# Altium PCB BUCK-BOOST.PcbDoc
Units mm, origin at the board's own origin, x right, y up, seen from the top; angles counter-clockwise.
Board outline 55.14 x 50.45 mm, 2 copper layers (Top Layer, Bottom Layer); 21 components, 8 nets, 42 pads, 27 vias.
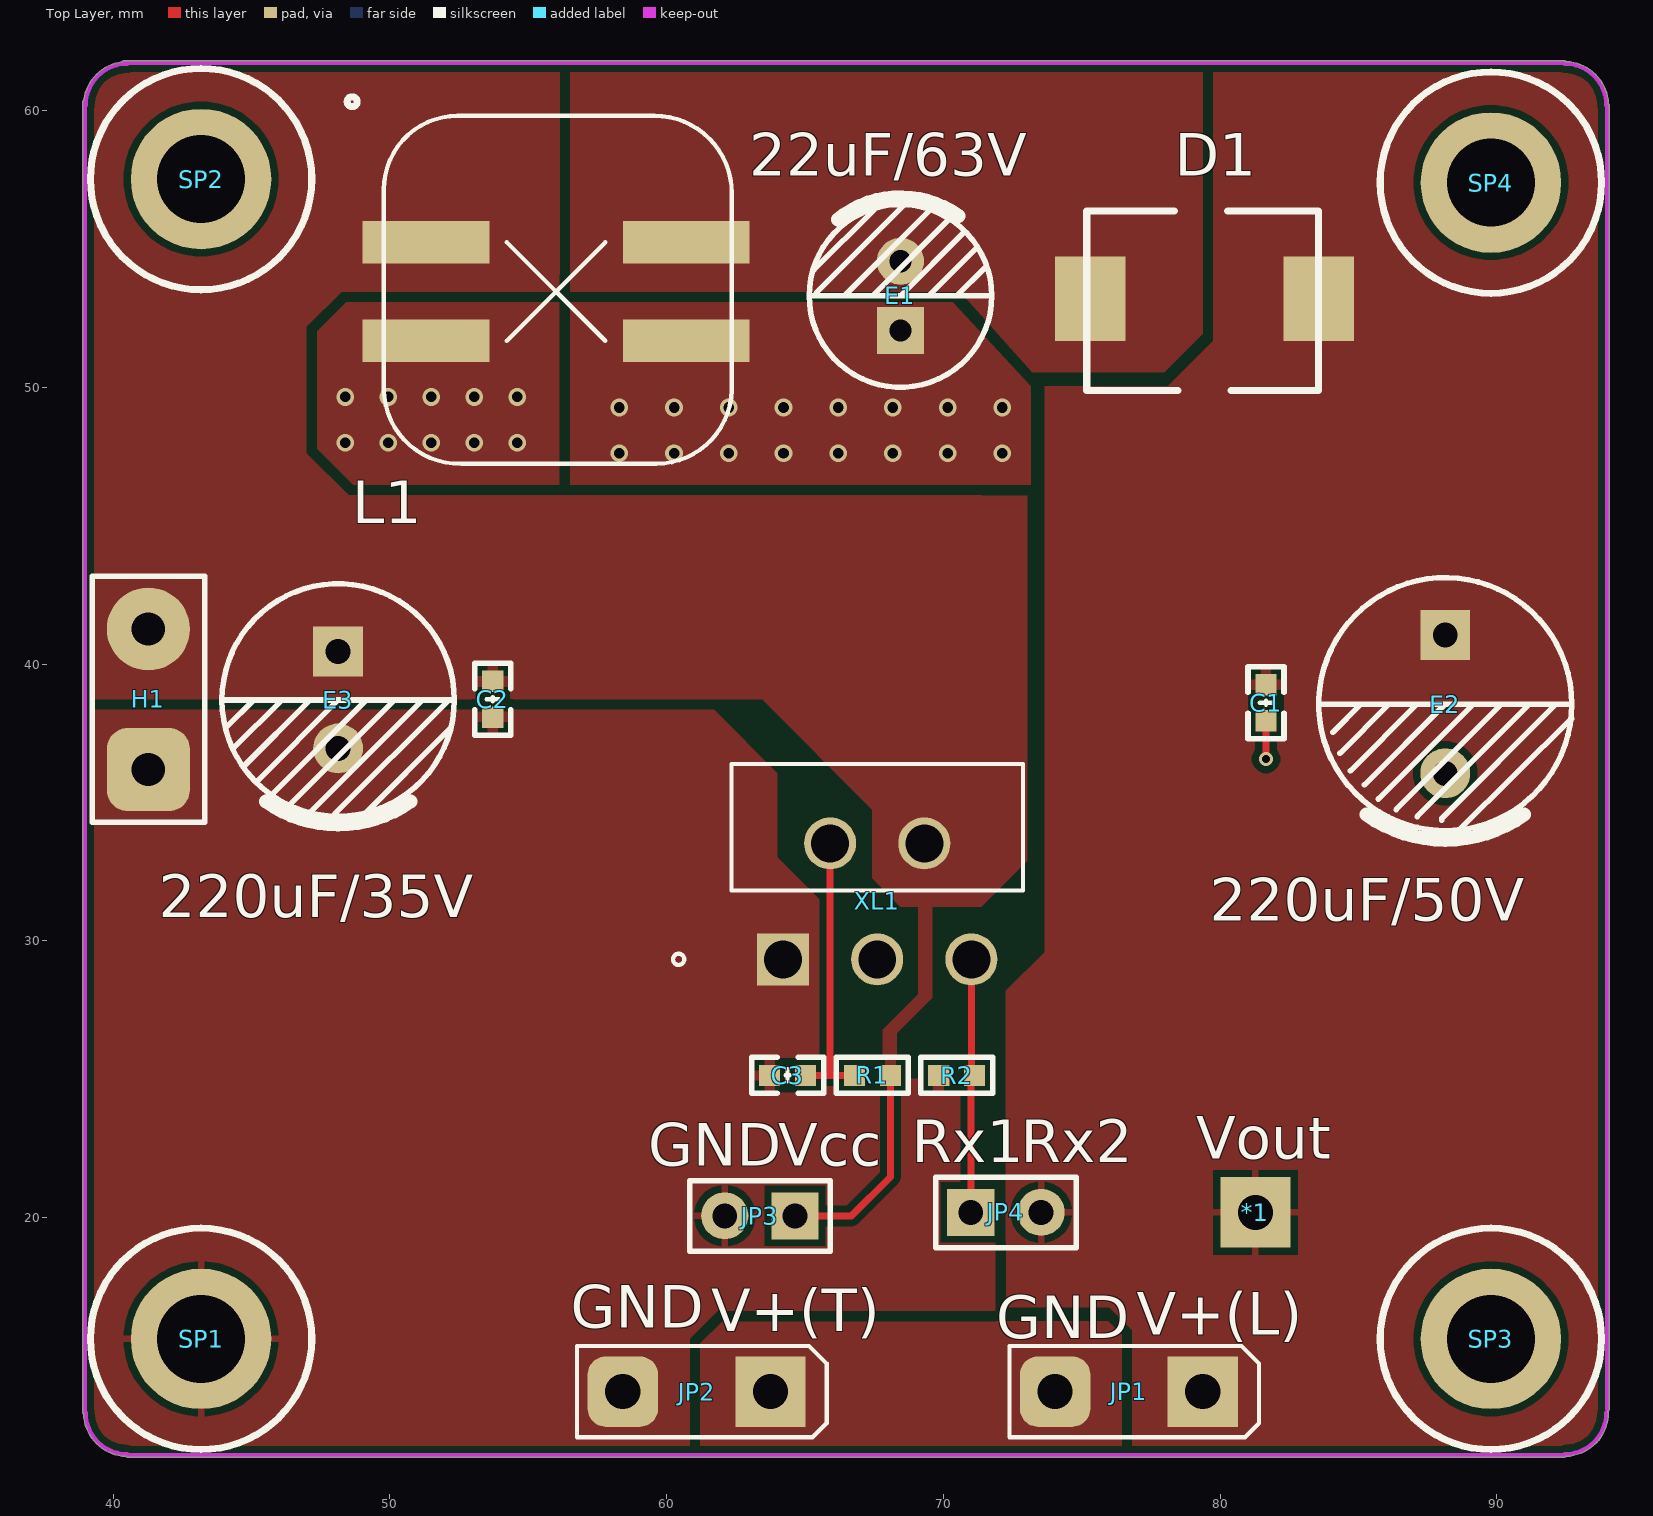
[diagram p0: Top Layer view]
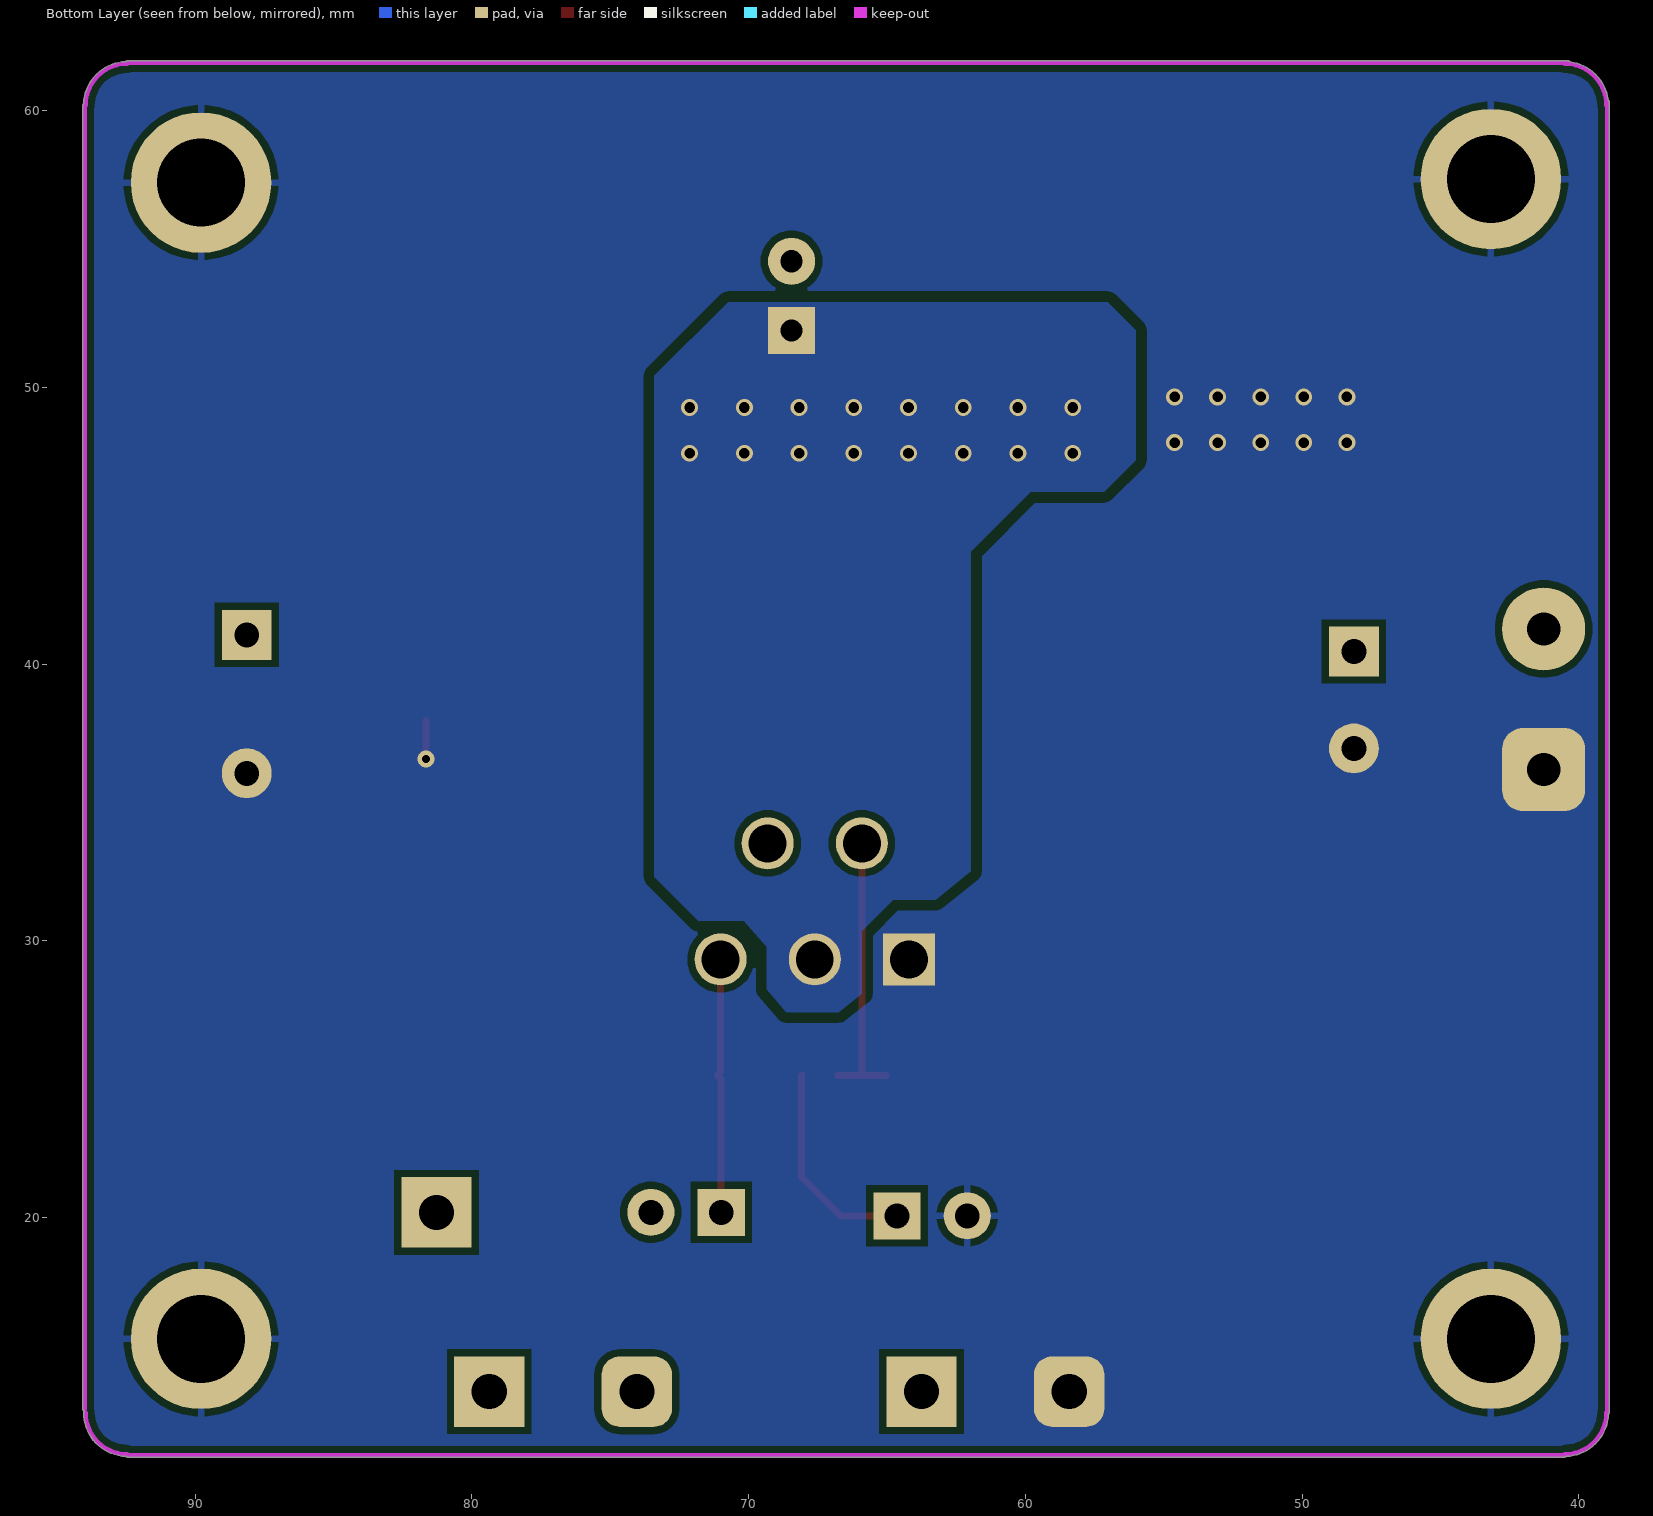
[diagram p1: Bottom Layer view, seen from below]

## Layer stack, top to bottom
Top Solder: solder mask 0.0102, Solder Resist, Dk 3.5
Top Layer: signal copper 0.0356
Dielectric 1: dielectric 0.32, FR-4, Dk 4.8
Bottom Layer: signal copper 0.0356
Bottom Solder: solder mask 0.0102, Solder Resist, Dk 3.5

## Board outline
38.912,12.954 ccw(c38.989,12.954) 38.937,12.897 ccw(c40.513,12.954) 40.456,11.378 ccw(c40.513,11.43) 40.513,11.353 92.456,11.353 ccw(c92.456,11.43) 92.513,11.378 ccw(c92.456,12.954) 94.033,12.954 ccw(c93.956,12.954) 94.008,13.01 ccw(c93.98,13.081) 94.057,13.081 94.057,60.198 ccw(c93.98,60.198) 94.032,60.255 ccw(c92.456,60.198) 92.513,61.774 ccw(c92.456,61.722) 92.456,61.799 40.386,61.799 ccw(c40.386,61.722) 40.321,61.763 ccw(c40.513,60.198) 38.948,60.39 ccw(c38.989,60.325) 38.912,60.325

## Design rules (kind name [scope] priority, off if disabled: settings)
Clearance [All] p1: gap=0.254 ignorepadtopadclearanceinfootprint=FALSE except(0: Arc-Hole Track-Hole SMDPad-Hole THPad-Hole Via-Hole Fill-Hole Poly-Hole Region-Hole Text-Hole; 0.381: Poly-Poly)
PlaneConnect [All] p1: pad.planeconnectstyle=Direct pad.reliefexpansion=0.508 pad.reliefentries=4 pad.reliefconductorwidth=0.254 pad.reliefairgap=0.254 via.planeconnectstyle=Relief via.reliefexpansion=0.508 via.reliefentries=4 via.reliefconductorwidth=0.254 via.reliefairgap=0.254
PolygonConnect [All] p1: thpad.connectstyle=Direct thpad.reliefconductorwidth=0.254 thpad.reliefentries=4 thpad.polygonreliefangle="90 Angle" thpad.airgapwidth=0.254 smdpad.connectstyle=Relief smdpad.reliefconductorwidth=0.381 smdpad.reliefentries=4 smdpad.polygonreliefangle="90 Angle" smdpad.airgapwidth=0.254 via.connectstyle=Direct via.reliefconductorwidth=0.254 via.reliefentries=4 via.polygonreliefangle="90 Angle" via.airgapwidth=0.254
RoutingVias [All] p1: holewidth=0.711 width=1.27 viastyle="Through Hole" minholewidth=0.305 minwidth=0.508 maxholewidth=0.711 maxwidth=1.27
SolderMaskExpansion [All] p1: expansion=0.102 istentingtop=FALSE
Width [All] p1: maxlimit=0.254 minlimit=0.152 preferedwidth=0.254
29 further rules are at their usual default settings.

## Classes and differential pairs
component class mode2: *1 C1 C3 D1 E1 E2 H1 JP1 JP2 JP4 L1 R1 R2 SP1 SP2 SP3 SP4 XL1

## Components (designator, comment, footprint, x,y, rotation, side; value= is the part's Value field where it differs from the comment)
*1 "V_x" "PCBComponent_1 - duplicate" 81.28,20.193 r0 top
C1 "105" "C 0603_L" 81.661,38.608 r270 top
C2 "105" "C 0603_L" 53.721,38.735 r270 top
C3 "105" "C 0603_L" 64.374,25.146 r180 top
D1 "B560C-13-F" DO-214AB 79.375,53.201 r90 top
E1 "22uF/63V" "CAP 2.5*6.3*11.2" 68.453,53.31 r90 top locked
E2 "220uF/50V" CAPAER_D100_L130_P055 88.138,38.558 r180 top
E3 "220uF/35V" CAPAER_D080_L125_P035 48.133,38.708 r180 top
H1 "PAD2" PAD2-5.08 41.275,36.195 r90 top
JP1 "Load_Pin" connect 79.375,13.716 r180 top
JP2 "OUT_Pin" connect 63.754,13.716 r180 top
JP3 "HDR-1X2" HDR2.54-LI-2P 63.373,20.066 r180 top
JP4 "HDR-1X2" HDR2.54-LI-2P 72.263,20.193 r0 top
L1 "MSD1278-473KLD" MSD-1278 56.007,53.467 r90 top locked
R1 "3K3" "R 0603_L" 67.437,25.146 r0 top
R2 "2K" "R 0603_L" 70.485,25.146 r0 top
SP1 "M3铜柱" M3x4+6_L 43.18,15.621 r0 top
SP2 "M3铜柱" M3x4+6_L 43.18,57.531 r0 top
SP3 "M3铜柱" M3x4+6_L 89.789,15.621 r0 top
SP4 "M3铜柱" M3x4+6_L 89.789,57.404 r0 top
XL1 "U1" T220-5 64.213,29.337 r0 top

## Footprints (in the part's own frame and the unit in brackets; to place one, negate y for a bottom-side part, rotate by r counter-clockwise, add the part's x,y. Pads: shape width x height; smd on the part's side, far side on the other; paste and mask are expansions set on the pad)
"C 0603_L" [mil] "无极性贴片电容"
  rect 30x30 smd: 1(-25.59,0) 2(25.59,0)
  silkscreen extent -51,-26 51,26, body extent -31,-16 31,16, height 32
"CAP 2.5*6.3*11.2" [mm] "脚距2.5mm直径6.3mm高度11.2mm"
  rect 1.7x1.7 hole 0.8: 1(-1.25,0)
  round 1.7 hole 0.8: 2(1.25,0)
  silkscreen extent -3.3,-3.3 3.56,3.3, body extent -3.15,-3.15 3.16,3.15, height 11.23
CAPAER_D080_L125_P035 [mm]
  rect 1.8x1.8 hole 0.9: 1(0,-1.75)
  round 1.8 hole 0.9: 2(0,1.75)
  silkscreen extent -4.2,-4.2 4.2,4.5, body extent -4,-4 4,4.01, height 12.51
CAPAER_D100_L130_P055 [mm]
  rect 1.8x1.8 hole 0.9: 1(0,-2.5)
  round 1.8 hole 0.9: 2(0,2.5)
  silkscreen extent -4.57,-4.57 4.57,4.9, body extent -5,-5 5,5, height 13
connect [mil]
  rect 100x100 hole 50: 1(0,0)
  rrect50% 100x100 hole 50: 2(210,0)
  silkscreen extent -80,-65 275,65
DO-214AB [mil]
  rect 120x100 smd: 1(0,160) 2(0,-165)
  silkscreen extent -130,-165 125,165, body extent -116,-156 116,157, height 92
HDR2.54-LI-2P [mm] "排针，2脚"
  rect 1.7x1.7 hole 0.9: 1(-1.27,0)
  round 1.7 hole 0.9: 2(1.27,0)
  silkscreen extent -2.54,-1.27 2.54,1.27, body extent -2.54,-1.27 2.54,1.27, height 8.5
M3x4+6_L [mm] "M3铜柱，长：4mm，螺纹长：6mm"
  round 5.08 hole 3.175: 1(0,0)
  silkscreen extent -4,-4 4,4, body extent -2.7,-2.35 2.7,2.35, height 4.05
MSD-1278 [mil]
  rect 60x180 smd: 1(70,185) 2(-70,185) 3(-70,-185) 4(70,-185)
  silkscreen extent -245,-250 277,297, body extent -240,-244 244,240, height 309
PAD2-5.08 [mm] "引线焊盘"
  rrect50% 3x3 hole 1.2: 1(0,0)
  round 3 hole 1.2: 2(5.08,0)
  silkscreen extent -1.91,-2.03 6.98,2.03
"PCBComponent_1 - duplicate" [mm]
  rect 2.54x2.54 hole 1.27: 1(0,0)
"R 0603_L" [mil] "1/10W贴片电阻"
  rect 30x30 smd: 1(-25.59,0) 2(25.59,0)
  silkscreen extent -51,-26 51,26, body extent -31,-16 32,16, height 16
T220-5 [mil]
  rect 74x74 / inner round 60 / far side rect 74x74 hole 54: 1(0,0)
  round 74 / inner round 60 / far side round 74 hole 54: 2(66.93,165) 3(133.86,0) 4(200.79,165) 5(267.72,0)
  silkscreen extent -157,-8 341,278, body extent -355,2 629,660, height 980

## Part data
C1 C2 C3: library part C, "无极性贴片电容", BOM名称=无极性贴片电容, 学习资源=www.ooocke.com, 版权归属=源创客
E1 E2 E3: library part C-CAP, "直插电解电容", BOM名称=直插电解电容, 学习资源=www.ooocke.com, 版权归属=源创客
H1: "引线焊盘", BOM名称=引线焊盘, 学习资源=www.ooocke.com, 版权归属=源创客
JP3 JP4: library part "Header 2", "2P接插件", BOM名称=2P接插件, 学习资源=www.ooocke.com, 版权归属=源创客
R1 R2: library part R, "贴片电阻", BOM名称=贴片电阻, 学习资源=www.ooocke.com, 版权归属=源创客
SP1 SP2 SP3 SP4: library part 铜柱加头小焊盘, "铜柱", BOM名称=铜柱, 学习资源=www.ooocke.com, 版权归属=源创客
XL1: library part XL6012

## Via types
v1: diameter 0.635/0.61 (per signal layer), hole 0.381, Top Layer to Bottom Layer, 26 vias
v2: diameter 0.508/0.61 (per signal layer), hole 0.305, Top Layer to Bottom Layer, 1 vias

## Nets (pads, with @x,y where several pads share a name; then routed paths per layer and width w, separated by ;. In a path a pad name is that pad's centre, name@x,y a point inside that pad or via, vN(x,y) a via of type N, cw(c..) or ccw(c..) an arc to the next point about the centre after c; other vN are vias at no path point)
GND: C1.2 C2.2 C3.2 E2.2 E3.2 H1.1 JP2.2 JP3.2 L1.2 R2.1 SP1.1 SP2.1 SP3.1 SP4.1 XL1.1 | length 1.4
  Top Layer w0.254: v2(81.661,36.576) C1.2
  other v1: 48.387,48.006 49.943,48.006 51.498,48.006 53.054,48.006 54.61,48.006 48.387,49.657 49.943,49.657 51.498,49.657 53.054,49.657 54.61,49.657
NetC3_1: C3.1 R1.1 XL1.2 | length 10.1
  Top Layer w0.254: C3.1 65.905,25.146 ; XL1.2 65.905,33.52 65.905,25.146 ; R1.1 65.905,25.146
NetD1_1: D1.1 E1.2 L1.4
NetE1_1: E1.1 L1.3 XL1.3
  other v1: 58.293,47.625 60.271,47.625 62.248,47.625 64.226,47.625 66.203,47.625 68.181,47.625 70.158,47.625 72.136,47.625 58.293,49.276 60.271,49.276 62.248,49.276 64.226,49.276 66.203,49.276 68.181,49.276 70.158,49.276 72.136,49.276
NetJP1_2: JP1.2 JP2.1
Rx: JP4.1 R2.2 XL1.5 | length 9.3
  Top Layer w0.254: JP4.1 70.993,25.004 R2.2 71.013,25.268 XL1.5
VIN: C2.1 E3.1 H1.2 JP3.1 L1.1 R1.2 XL1.4 | length 7.7
  Top Layer w0.254: JP3.1 66.675,20.066 68.087,21.478 R1.2 R1.2@68.072,25.161
VOUT: *1.1 C1.1 D1.2 E2.1 JP1.1 JP4.2

## Polygon pours and split planes (outlines as drawn)
VIN on Top Layer "VIN_L01_P009" (solid, pour order 9): 69.088,32.004 69.596,32.004 69.596,27.94 68.326,26.67 68.326,24.765 67.818,24.765 67.818,26.797 69.088,28.067
GND on Top Layer "GND_L01_P003" (solid, pour order 3): 67.183,25.019 71.12,25.019 71.882,24.257 71.882,16.637 61.849,16.637 60.833,15.621 60.833,11.43 38.948,11.43 38.948,38.354 61.722,38.354 64.008,36.068 64.008,33.02 66.04,30.988 66.04,26.162
NetJP1_2 on Top Layer "NETJP1_2_L01_P007" (solid, pour order 7): 60.706,16.256 77.978,16.256 77.978,11.43 77.851,11.557 60.706,11.557
VOUT on Top Layer "VOUT_L01_P004" (solid, pour order 4): 72.263,16.764 76.005,16.764 76.835,15.934 76.835,11.43 94.008,11.43 94.008,61.722 79.756,61.722 79.756,51.689 78.105,50.038 73.66,50.038 73.66,29.591 72.263,28.194 72.263,20.32
GND on Top Layer "GND_L01_P006" (solid, pour order 6): 56.261,46.355 47.244,46.355 47.244,53.213 56.261,53.213
NetE1_1 on Top Layer "NETE1_1_L01_P002" (solid, pour order 2): 56.515,53.34 56.515,46.482 73.152,46.482 73.152,50.038 70.104,53.34
NetD1_1 on Top Layer "NETD1_1_L01_P001" (solid, pour order 1): 79.375,51.943 77.978,50.546 73.22,50.546 70.612,53.467 56.515,53.467 56.515,61.763 79.375,61.763
VIN on Top Layer "VIN_L01_P000" (solid, pour order 0): 67.437,32.258 68.453,31.242 71.374,31.242 73.025,32.893 73.025,46.101 48.514,46.101 46.99,47.625 46.99,52.197 48.26,53.467 56.134,53.467 56.134,61.763 38.948,61.763 38.948,38.735 63.45,38.735 67.437,34.748
GND on Bottom Layer "GND_L02_P008" (solid, pour order 8): 38.989,61.763 38.989,11.43 93.98,11.43 93.98,61.763
NetE1_1 on Bottom Layer "NETE1_1_L02_P005" (solid, pour order 5): 59.817,46.228 61.976,44.069 61.976,32.512 63.234,31.496 64.77,31.496 65.913,30.353 65.913,28.086 66.743,27.432 68.637,27.432 69.342,28.261 69.342,29.797 70.175,30.734 71.815,30.734 73.406,32.325 73.406,50.419 70.739,53.086 57.023,53.086 56.007,52.07 56.007,47.371 57.15,46.228

## Keep-outs
Keep-Out Layer:
  lines w0.152: 38.989,12.954 38.989,60.325 ; 39.013,12.954 ccw(c40.513,12.954) 40.513,11.454 ; 39.013,60.198 cw(c40.513,60.198) 40.513,61.698 ; 40.386,61.722 92.456,61.722 ; 40.513,11.43 92.456,11.43 ; 92.456,11.454 ccw(c92.456,12.954) 93.956,12.954 ; 92.456,61.698 cw(c92.456,60.198) 93.956,60.198 ; 93.98,13.081 93.98,60.198

## Silkscreen, mask and mechanical layers (free items; w line width, h text height)
Top Overlay:
  text "Vout" at 79.146,22.123 h1.52
  text "Rx1" at 68.859,21.996 h1.52
  text "Rx2" at 72.796,21.996 h1.52
  text "GND" at 59.334,21.869 h1.52
  text "Vcc" at 64.033,21.869 h1.52
  text "GND" at 56.54,16.027 h1.52
  text "V+(T)" at 61.62,15.9 h1.52
  text "V+(L)" at 76.987,15.773 h1.52
  text "GND" at 71.907,15.646 h1.52

## Dimensions
40.386,61.722 to 40.513,11.43 on Top Overlay
38.989,12.954 to 93.98,13.081 on Top Overlay